# EAGLE board CT_schematic (EAGLE 7.6.0)

Size 100 x 80 mm. Coordinates in mm from the lower left corner, seen from the top.
Outline: 0,0 100,0 100,80 0,80 0,0
Copper layers (1*16): Top 0.035mm / dielectric 1.5mm / Bottom 0.035mm
Design rules "default": minimum track width 10mil, minimum drill 24mil, track to track 8mil, track to pad 8mil, pad to pad 8mil, via to via 8mil, smd to smd 8mil, copper to edge 40mil, drill to drill 8mil, minimum pad ring 10mil, minimum via ring 8mil, stop-mask expansion 4mil, vias tented up to drill 0mil, thermal gap 10mil

## Footprints (pad centres in the part's own frame; a part is rotated, then mirrored left to right if it is on the bottom)
C0603 = smd 0.8 x 0.8: 1 -0.762,0; 2 0.762,0
C0402 = smd 0.5 x 0.5: 1 -0.508,0; 2 0.508,0
C0805 = smd 1.2 x 1.3: 1 -1.016,0; 2 1.016,0
C1206 = smd 1.3 x 1.6: 1 -1.524,0; 2 1.524,0
L0603 = smd 0.8 x 0.8: 1 -0.762,0; 2 0.762,0
DR1040 = smd 1.6 x 3.2: 1 -4.458,0; 2 4.458,0
R0603 = smd 0.8 x 0.8: 1 -0.762,0; 2 0.762,0
UFQFPN28 = smd 0.559 x 0.305: 1 -2.07,1.5; 7 -2.07,-1.5; 15 2.07,-1.5; 21 2.07,1.5 | smd 0.813 x 0.305: 2 -1.943,1; 3 -1.943,0.5; 4 -1.943,0; 5 -1.943,-0.5; 6 -1.943,-1; 16 1.943,-1; 17 1.943,-0.5; 18 1.943,0; 19 1.943,0.5; 20 1.943,1 | smd 0.305 x 0.559: 8 -1.5,-2.07; 14 1.5,-2.07; 22 1.5,2.07; 28 -1.5,2.07 | smd 0.305 x 0.813: 9 -1,-1.943; 10 -0.5,-1.943; 11 0,-1.943; 12 0.5,-1.943; 13 1,-1.943; 23 1,1.943; 24 0.5,1.943; 25 0,1.943; 26 -0.5,1.943; 27 -1,1.943
TST-110-05-T-D-RA = drill 1 pad 1.7 square: 1 0,0 | drill 1 pad 1.7: 2 0,2.54; 3 2.54,0; 4 2.54,2.54; 5 5.08,0; 6 5.08,2.54; 7 7.62,0; 8 7.62,2.54; 9 10.16,0; 10 10.16,2.54; 11 12.7,0; 12 12.7,2.54; 13 15.24,0; 14 15.24,2.54; 15 17.78,0; 16 17.78,2.54; 17 20.32,0; 18 20.32,2.54; 19 22.86,0; 20 22.86,2.54
LGA-16 = smd 1.5 x 0.4: 1 -2.1,0.975; 2 -2.1,0.325; 3 -2.1,-0.325; 4 -2.1,-0.975; 9 2.1,-0.975; 10 2.1,-0.325; 11 2.1,0.325; 12 2.1,0.975 | smd 0.4 x 1.5: 5 -0.975,-2.1; 6 -0.325,-2.1; 7 0.325,-2.1; 8 0.975,-2.1; 13 0.975,2.1; 14 0.325,2.1; 15 -0.325,2.1; 16 -0.975,2.1
QFN24_2 = smd 0.6 x 0.2: 1 -1.6,1; 2 -1.6,0.6; 3 -1.6,0.2; 4 -1.6,-0.2; 5 -1.6,-0.6; 6 -1.6,-1; 13 1.6,-1; 14 1.6,-0.6; 15 1.6,-0.2; 16 1.6,0.2; 17 1.6,0.6; 18 1.6,1 | smd 0.2 x 0.6: 7 -1,-1.6; 8 -0.6,-1.6; 9 -0.2,-1.6; 10 0.2,-1.6; 11 0.6,-1.6; 12 1,-1.6; 19 1,1.6; 20 0.6,1.6; 21 0.2,1.6; 22 -0.2,1.6; 23 -0.6,1.6; 24 -1,1.6 | smd 1.75 x 1.59: 25 0,0
ASFL1 = smd 1.7 x 1.5: 1 -1.27,-1.1; 2 1.27,-1.1; 3 1.27,1.1; 4 -1.27,1.1
TSOT-23-5 = smd 1.3 x 0.62: 1 -1.31,0.95; 2 -1.31,0; 3 -1.31,-0.95; 4 1.31,-0.95; 5 1.31,0.95
DFN8_2X3MC = smd 0.813 x 0.305: 1 -1.398,0.75; 2 -1.398,0.25; 3 -1.398,-0.25; 4 -1.398,-0.75; 5 1.398,-0.75; 6 1.398,-0.25; 7 1.398,0.25; 8 1.398,0.75 | smd 1.753 x 1.549: 9 0,0
JST-2-SMD = smd 1 x 4.6: 1 -1,-3.7; 2 1,-3.7 | smd 1.6 x 3.4: NC1 -3.4,1.5; NC2 3.4,1.5
FCI_10118193-0001LF = smd 0.4 x 1.35: 1 -1.3,2.675; 2 -0.65,2.675; 3 0,2.675; 4 0.65,2.675; 5 1.3,2.675 | smd 1.6 x 1.4: 6 -3.2,2.45; 7 3.2,2.45 | smd 1.9 x 1.9: 8 -1.2,0; 9 1.2,0 | hole 0.5: -3.3,0; 3.3,0
SON-6 = smd 0.55 x 0.3: 1 -0.355,0.5 | smd 0.52 x 0.3: 2 -0.37,0; 3 -0.37,-0.5; 4 0.37,-0.5; 5 0.37,0; 6 0.37,0.5
SW_4-1437565-2 = smd 1.4 x 2.1: 1 -2.23,4.55; 2 -2.23,-4.55; 3 2.23,4.55; 4 2.23,-4.55
LGM67K-G1J2-24-Z = smd 0.8 x 1.4: A -2,0; C 0,0
NC7SZ125M5X = smd 1.3 x 0.7: 1 -1.3,0.95; 2 -1.3,0; 3 -1.3,-0.95; 4 1.3,-0.95; 5 1.3,0.95

## Placement (x,y rotation side)
C1  1e-07  [C0603]  -31.75,50.8 0 top  (outside the outline)
C2  4.7e-06  [C0603]  -24.13,50.8 0 top  (outside the outline)
C3  1e-08  [C0603]  -35.56,50.8 0 top  (outside the outline)
C4  1e-06  [C0603]  -39.37,50.8 0 top  (outside the outline)
C5  1e-07  [C0402]  -26.67,55.88 0 top  (outside the outline)
C6  1e-08  [C0402]  -30.48,55.88 0 top  (outside the outline)
C7  1e-08  [C0402]  -34.29,55.88 0 top  (outside the outline)
C8  1e-08  [C0402]  -38.1,55.88 0 top  (outside the outline)
C9  4.7e-07  [C0603]  -27.94,50.8 0 top  (outside the outline)
C10  1e-07  [C0402]  -41.91,55.88 0 top  (outside the outline)
C11  1e-07  [C0402]  -45.72,55.88 0 top  (outside the outline)
C12  1e-08  [C0402]  -49.53,55.88 0 top  (outside the outline)
C13  1e-08  [C0402]  -53.34,55.88 0 top  (outside the outline)
C14  1e-05  [C0805]  -21.59,40.64 0 top  (outside the outline)
C15  1e-05  [C0805]  -26.67,40.64 0 top  (outside the outline)
C16  1e-07  [C0402]  -57.15,55.88 0 top  (outside the outline)
C17  1e-05  [C1206]  -45.72,33.02 0 top  (outside the outline)
C18  1e-05  [C1206]  -52.07,33.02 0 top  (outside the outline)
C19  1e-08  [C0402]  -15.24,60.96 0 top  (outside the outline)
C20  1e-08  [C0402]  -19.05,60.96 0 top  (outside the outline)
F1  240.0  [L0603]  -43.18,50.8 0 top  (outside the outline)
I1  2.5e-06  [DR1040]  -38.1,6.35 0 top  (outside the outline)
R1  10000.0  [R0603]  -20.32,45.72 0 top  (outside the outline)
R2  1000.0  [R0603]  -46.99,50.8 0 top  (outside the outline)
R3  1600.5  [R0603]  -50.8,50.8 0 top  (outside the outline)
R4  4700.0  [R0603]  -54.61,50.8 0 top  (outside the outline)
R5  2200.0  [R0603]  -58.42,50.8 0 top  (outside the outline)
R6  2200.0  [R0603]  -15.24,55.88 0 top  (outside the outline)
R7  10000.0  [R0603]  -25.4,45.72 0 top  (outside the outline)
R8  10000.0  [R0603]  -30.48,45.72 0 top  (outside the outline)
R9  10000.0  [R0603]  -35.56,45.72 0 top  (outside the outline)
R10  10000.0  [R0603]  -40.64,45.72 0 top  (outside the outline)
R11  10000.0  [R0603]  -45.72,45.72 0 top  (outside the outline)
R12  10000.0  [R0603]  -50.8,45.72 0 top  (outside the outline)
R13  220000.0  [R0603]  -49.53,40.64 0 top  (outside the outline)
R14  1000000.0  [R0603]  -44.45,40.64 0 top  (outside the outline)
R15  10000.0  [R0603]  -55.88,45.72 0 top  (outside the outline)
R16  10000.0  [R0603]  -15.24,50.8 0 top  (outside the outline)
R17  9100.0  [R0603]  -19.05,55.88 0 top  (outside the outline)
R18  680000.0  [R0603]  -54.61,40.64 0 top  (outside the outline)
R19  120000.0  [R0603]  -15.24,45.72 0 top  (outside the outline)
R20  2000.0  [R0603]  -22.86,55.88 0 top  (outside the outline)
R21  10000.0  [R0603]  -20.32,50.8 0 top  (outside the outline)
U1  stm32f031g4u7  [UFQFPN28]  -38.1,34.29 0 top  (outside the outline)
U2  TST-110-05-T-D-RA  [TST-110-05-T-D-RA]  -46.99,24.13 0 top  (outside the outline)
U3  l3g4200d  [LGA-16]  -52.07,25.4 0 top  (outside the outline)
U4  MPU-9250  [QFN24_2]  -31.75,40.64 0 top  (outside the outline)
U5  ASFL1-25MHZ-NCS  [ASFL1]  -26.67,16.51 0 top  (outside the outline)
U6  ltc3406es5  [TSOT-23-5]  -36.83,39.37 0 top  (outside the outline)
U7  MCP73831T-2ACI/MC  [DFN8_2X3MC]  -27.94,59.69 0 top  (outside the outline)
U8  S2B-PH-SM4-TB(LF)(SN)  [JST-2-SMD]  -53.34,6.35 0 top  (outside the outline)
U9  10118193-0001LF  [FCI_10118193-0001LF]  -35.56,16.51 0 top  (outside the outline)
U10  TPS3895ADRYR  [SON-6]  -21.59,59.69 0 top  (outside the outline)
U11  4-1437565-2  [SW_4-1437565-2]  -27.94,6.35 0 top  (outside the outline)
U12  Q65110A2395  [LGM67K-G1J2-24-Z]  -17.78,34.29 0 top  (outside the outline)
U13  nc7sz125m5x  [NC7SZ125M5X]  -57.15,33.02 0 top  (outside the outline)
U14  nc7sz125m5x  [NC7SZ125M5X]  -15.24,39.37 0 top  (outside the outline)

## Library data of the parts
C1-C20 F1 I1 R1-R21 U1-U14 = circuit_tree

## Nets
CLK_U1_2: U1.2 U5.3
GND: C1.2 C2.2 C3.2 C4.2 C5.2 C6.2 C7.2 C8.2 C10.2 C11.2 C12.2 C13.2 C14.2 C15.1 C15.2 C16.2 C17.2 C18.2 C19.2 C20.2 R2.2 R7.2 R9.1 R9.2 R12.2 R13.2 R17.2 R19.2 R20.2 U1.16 U2.4 U2.6 U2.8 U2.10 U2.12 U2.14 U2.16 U2.18 U2.20 U3.8 U3.9 U3.10 U3.11 U3.12 U3.13 U4.18 U4.20 U4.25 U5.2 U6.2 U7.6 U7.9 U8.2 U9.5 U9.6 U9.7 U9.8 U9.9 U10.2 U12.C U13.2 U13.3 U14.1 U14.3
INPUT_USBPOWER_5V: C17.1 R21.2 U7.1 U7.2 U9.1
NET_U1_1: R7.1 U1.1
NET_U1_4: R4.1 U1.4 U14.4
NET_U1_5: C3.1 C4.1 F1.1 U1.5
NET_U1_19: R5.1 U1.19 U4.23
NET_U1_20: R6.1 U1.20 U4.24
NET_U1_27: R3.1 U1.27 U12.A
NET_U1_28: R1.1 U1.28 U11.3 U11.4
NET_U3_14: C8.1 C9.1 U3.14
NET_U3_ATNET_1: C9.2
NET_U4_9: R12.1 U4.9
NET_U4_10: C10.1 U4.10
NET_U4_22: R11.1 U4.22
NET_U6_1: U6.1
NET_U6_3: I1.1 U6.3
NET_U6_5: R13.1 R14.1 U6.5
NET_U6_ATNET_3: I1.2 R14.2
NET_U7_5: R21.1 U7.5
NET_U7_8: R20.1 U7.8
NET_U10_1: R16.1 R17.1 U10.1
NET_U10_3: R18.2 R19.1 U10.3
NET_U10_4: R15.1 U10.4 U13.4 U14.2
NET_U11_1: R2.1 U11.1 U11.2
PROC_GPIO_TO_U4_FSYNC: U1.6 U4.11
PROC_GPIO_TO_U4_INT_B: U1.3 U4.12
PROC_SPI1_MISO: U1.12 U3.4
PROC_SPI1_MOSI: U1.13 U3.3
PROC_SPI1_NSS: R10.1 U1.10 U3.5
PROC_SPI1_SCK: U1.11 U3.2
PROC_SYS_SWCLK: U1.22 U2.9
PROC_SYS_SWDIO: U1.21 U2.7
RST_OUT_U2_SRESET_B: R8.1 U2.15 U13.1
VCC_S1_3V7: C14.1 C18.1 U6.4 U7.3 U7.4 U8.1
VCC_TIER1_3V3: C1.1 C2.1 C5.1 C6.1 C7.1 C11.1 C12.1 C13.1 C15.2 C16.1 C19.1 C20.1 F1.2 I1.2 R1.2 R3.2 R4.2 R5.2 R6.2 R8.2 R10.2 R11.2 R14.2 R15.2 R16.2 R18.1 U1.17 U2.1 U3.1 U3.15 U3.16 U4.1 U4.8 U4.13 U5.4 U10.6 U13.5 U14.5

## Tracks (layer width: path | path; a pad name or v marks a point on that pad's centre or on a via)
CLK_U1_2  (1 unrouted)
GND  (63 unrouted)
INPUT_USBPOWER_5V  (4 unrouted)
NET_U1_1  (1 unrouted)
NET_U1_4  (2 unrouted)
NET_U1_5  (3 unrouted)
NET_U1_19  (2 unrouted)
NET_U1_20  (2 unrouted)
NET_U1_27  (2 unrouted)
NET_U1_28  (3 unrouted)
NET_U3_14  (2 unrouted)
NET_U4_9  (1 unrouted)
NET_U4_10  (1 unrouted)
NET_U4_22  (1 unrouted)
NET_U6_3  (1 unrouted)
NET_U6_5  (2 unrouted)
NET_U6_ATNET_3  (1 unrouted)
NET_U7_5  (1 unrouted)
NET_U7_8  (1 unrouted)
NET_U10_1  (2 unrouted)
NET_U10_3  (2 unrouted)
NET_U10_4  (3 unrouted)
NET_U11_1  (2 unrouted)
PROC_GPIO_TO_U4_FSYNC  (1 unrouted)
PROC_GPIO_TO_U4_INT_B  (1 unrouted)
PROC_SPI1_MISO  (1 unrouted)
PROC_SPI1_MOSI  (1 unrouted)
PROC_SPI1_NSS  (2 unrouted)
PROC_SPI1_SCK  (1 unrouted)
PROC_SYS_SWCLK  (1 unrouted)
PROC_SYS_SWDIO  (1 unrouted)
RST_OUT_U2_SRESET_B  (2 unrouted)
VCC_S1_3V7  (5 unrouted)
VCC_TIER1_3V3  (37 unrouted)